# Altium PCB FCM_Integrated.PcbDoc (part 2 of 3)
Units mil, origin at the board's own origin, x right, y up, seen from the top; angles counter-clockwise.
Board outline 5855 x 4354 mil, 4 copper layers (Top Layer, Power, Ground, Bottom Layer), stack 23.756 mil thick; 164 components, 92 nets, 619 pads, 86 vias.
Unrouted connection lines stored in the file: 241.
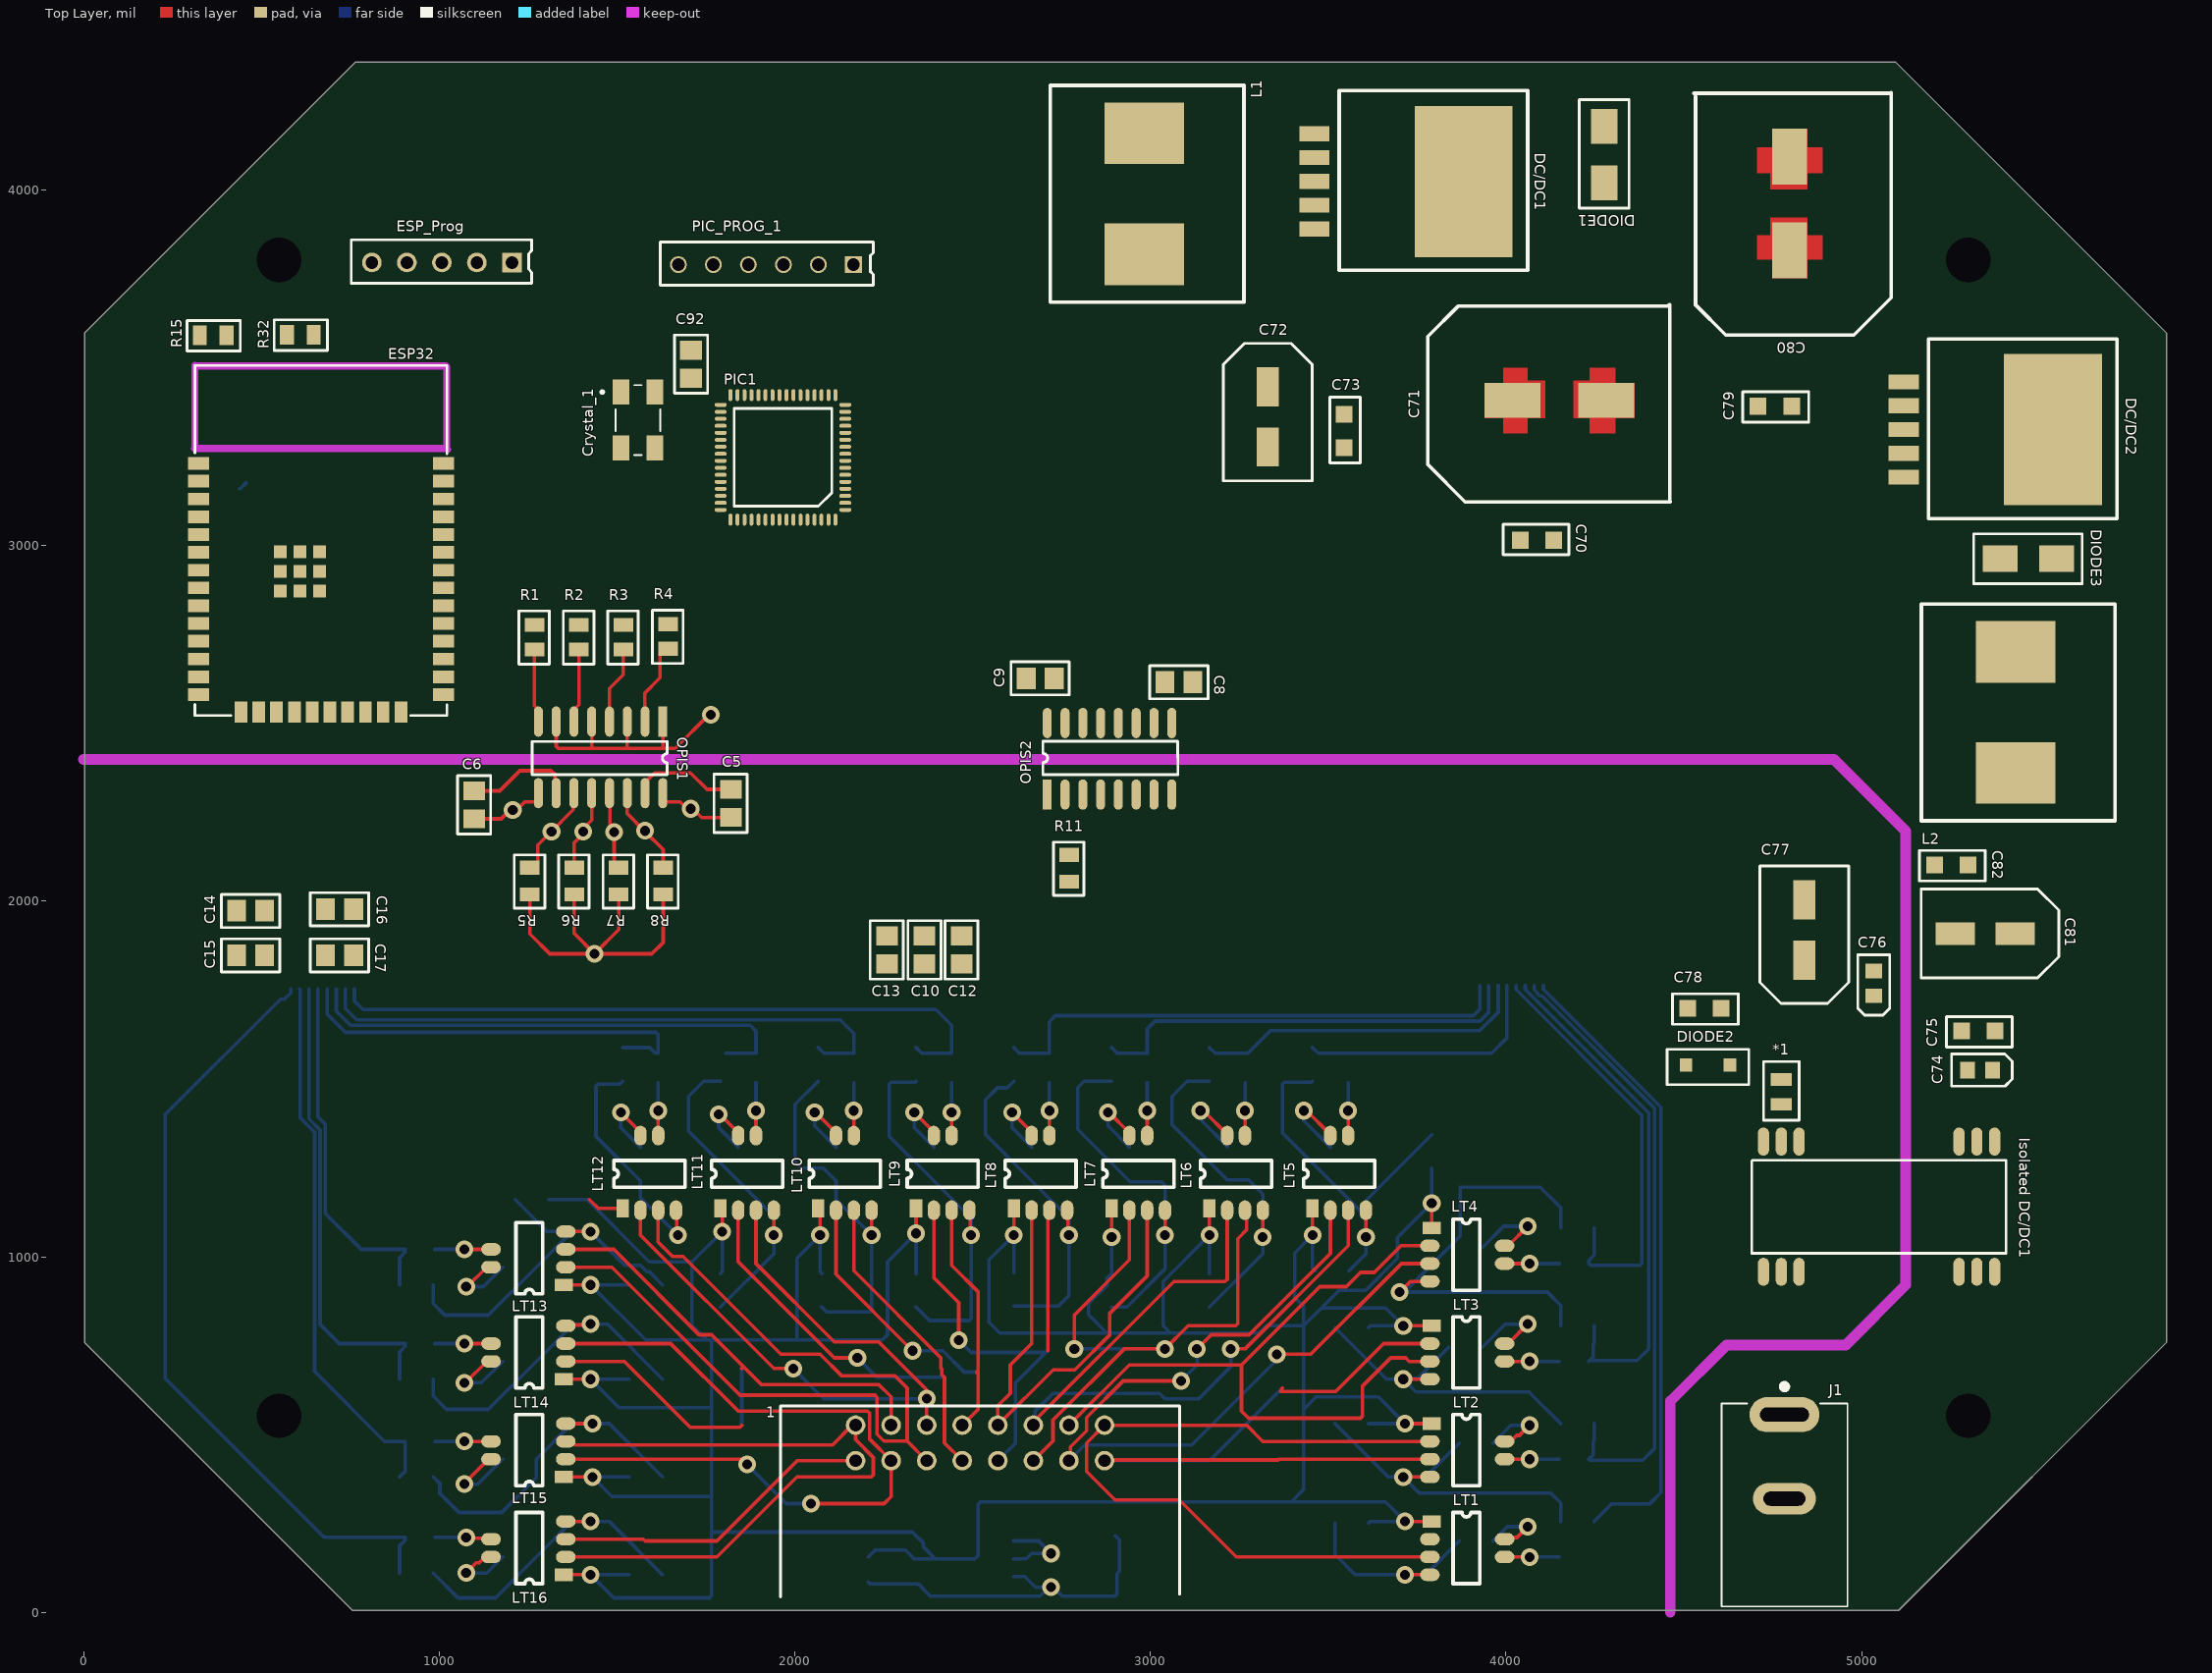
[diagram p0: Top Layer view]

## Part data (continued)
U1: "Precision Micropower, Low Dropout Voltage Reference, 2.048 V Output, 2.3 to 15 V Supply, Industrial, 8-pin SOIC (R-8), Reel", Manufacturer="Analog Devices", Operating Temp Range="-40 to 85 degC", Code_JEDEC=MS-012-AA, ComponentLink1Description="Manufacturer URL", ComponentLink1URL=http://www.analog.com/en/index.html, ComponentLink2Description=Datasheet, ComponentLink2URL=http://www.analog.com/static/imported-files/data_sheets/REF19xSeries.pdf, ComponentLink3Description="Package Specification", ComponentLink3URL=http://www.analog.com/static/imported-files/packages/PKG_PDF/SOIC_Narrow%20(R)/R_8.pdf, ComponentLink4Description="URL Link1", ComponentLink4URL="Product URL:http://www.analog.com/en/special-linear-functions/voltage-references/ref191/products/product.html", DatasheetVersion="Rev. L", Mounting Technology="Surface Mount", PackageDescription="8-Pin Standard Small Outline Package, Body 4.9 x 3.9 mm, Pitch 1.27 mm", PackageReference=R-8, PackageVersion="060506-A, 06/2006", Packing=Reel, PartNumber=REF191GSZ-REEL, Ref Out TC (ppm/C)=10, Vout=2.048V
Vref_1: library part MAX6037AAUKADJ+T, "IC VREF SERIES ADJ 0.2% SOT23-5", Case/Package=SOT-23-5, Manufacturer=Maxim, Max Input Voltage=5.5V, Max Operating Temperature=125°C, Max Output Current=5mA, Max Output Voltage=5V, Max Supply Current=250uA, Min Operating Temperature=-40°C, Min Output Voltage=1.184V, Package Quantity=1, Supplier Part Number 1=MAX6037AAUKADJ+TCT-ND, Temperature Coefficient=25ppm/°C, Tolerance=0.2%, Category="Voltage References", ComponentLink1Description=https://datasheet.ciiva.com/2008/max6037-max6037c-2008462.pdf?src-supplier=Digi-Key, ComponentLink1URL=https://datasheet.ciiva.com/2008/max6037-max6037c-2008462.pdf?src-supplier=Digi-Key, ComponentLink2Description=https://datasheet.ciiva.com/2008/max6037-max6037c-2008463.pdf?src-supplier=Digi-Key, ComponentLink2URL=https://datasheet.ciiva.com/2008/max6037-max6037c-2008463.pdf?src-supplier=Digi-Key, ComponentLink3Description=https://datasheet.ciiva.com/2008/max6037-max6037c-2008461.pdf?src-supplier=Digi-Key, ComponentLink3URL=https://datasheet.ciiva.com/2008/max6037-max6037c-2008461.pdf?src-supplier=Digi-Key, Lead Free="Lead Free", Manufacturer Part Number=MAX6037AAUKADJ+T, Mount="Surface Mount", Number of Pins=5, Operating Supply Current=250uA, Output Current=5mA, Output Type=Adjustable, Output Voltage=5V, Packaging="Tape and Reel", Radiation Hardening=No, REACH SVHC=Unknown, Reference Type=Series,Adjustable, Reference Voltage=5V, RoHS=Yes, RoHS Compliant=Yes, Series=-, Supplier 1=Digi-Key, Weight=0.001058oz

## Free pads (board coordinates)
  rect 40x40 smd far side: 1(1906,224) 1(3229,311)
  round 60 hole 125: 2(550,553) 3(550,3803) 3(5300,553) 3(5300,3803)

## Via types
v1: diameter 50, hole 28, Top Layer to Bottom Layer, 86 vias